# Allegro board PE500_R10_Board_source_file.brd
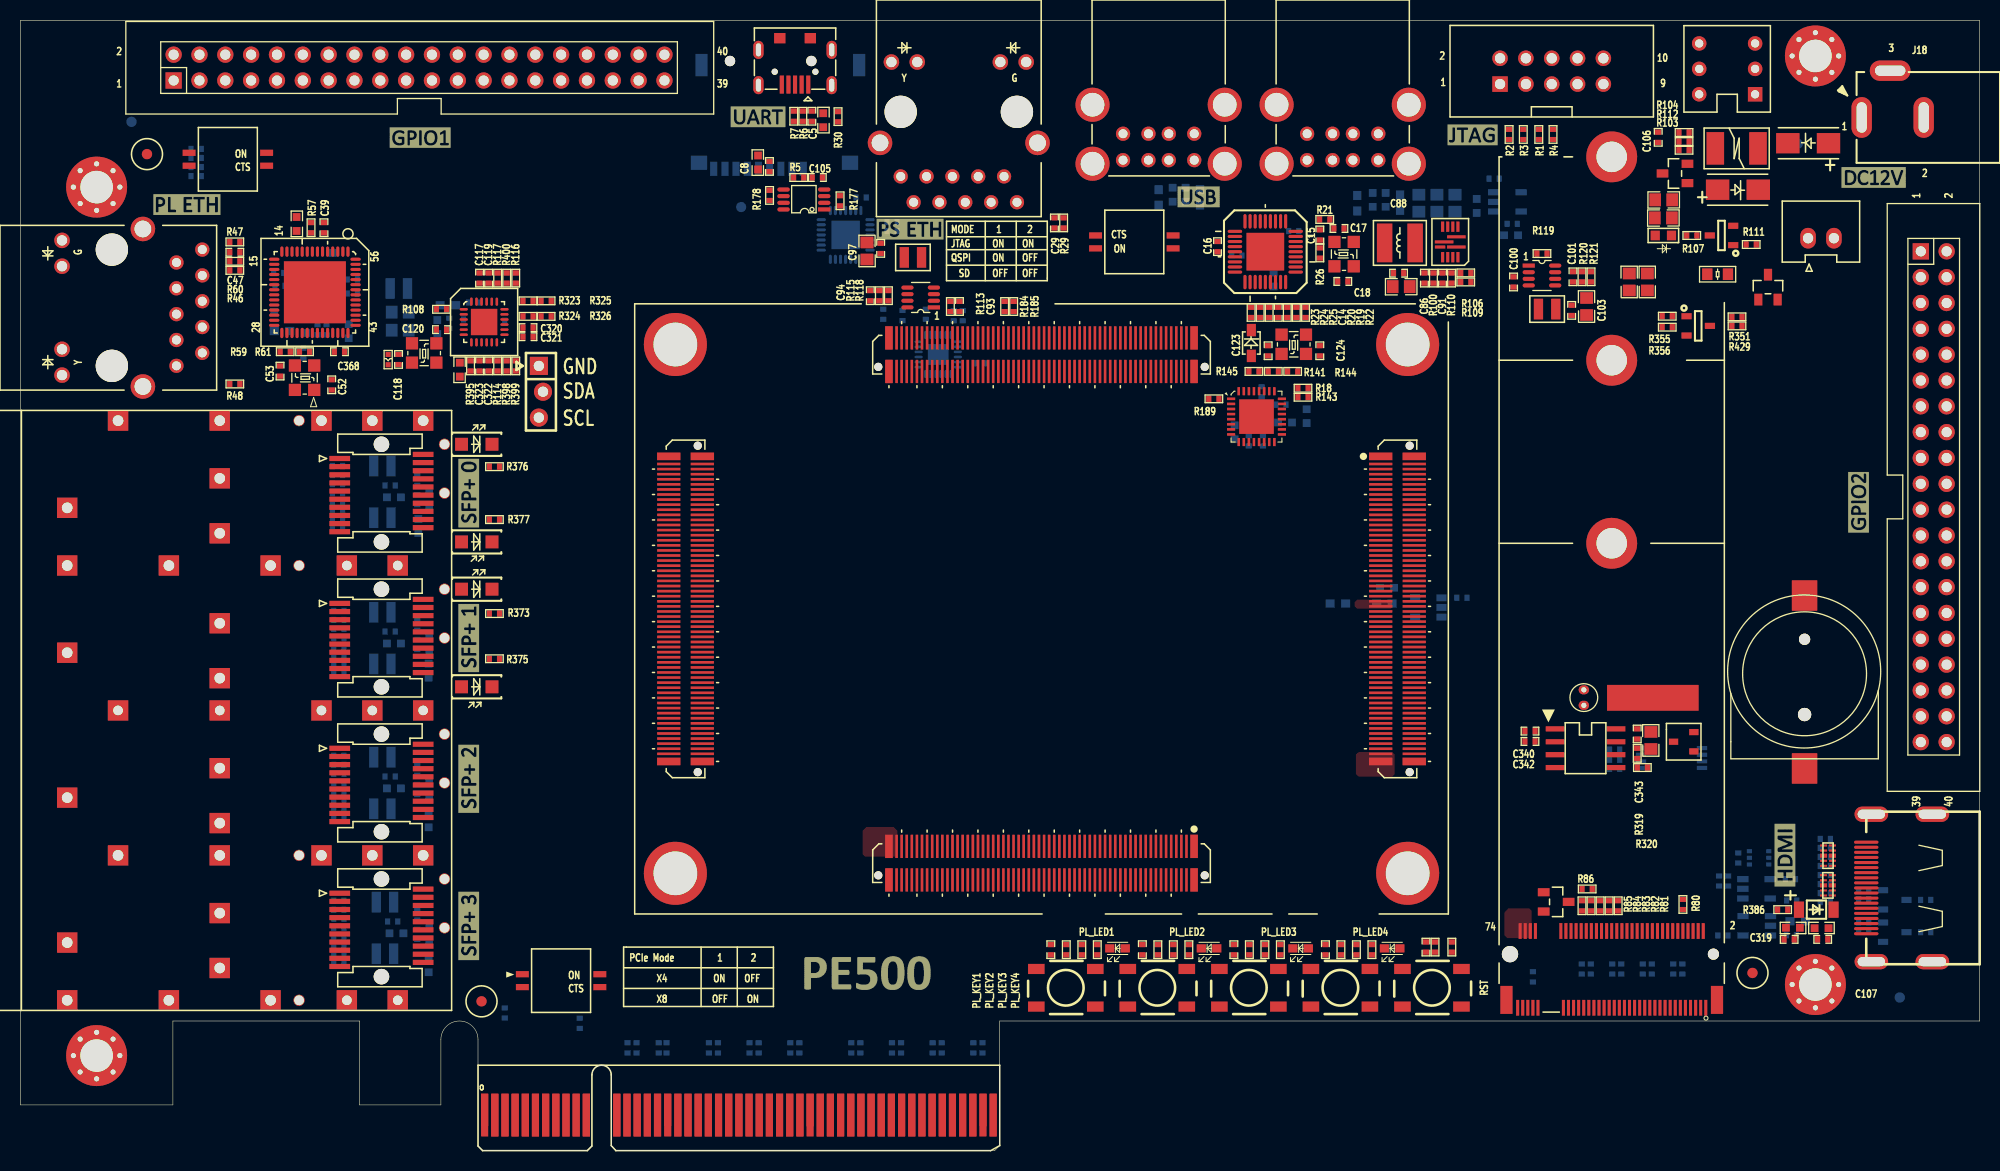
[diagram p0: board, top side]
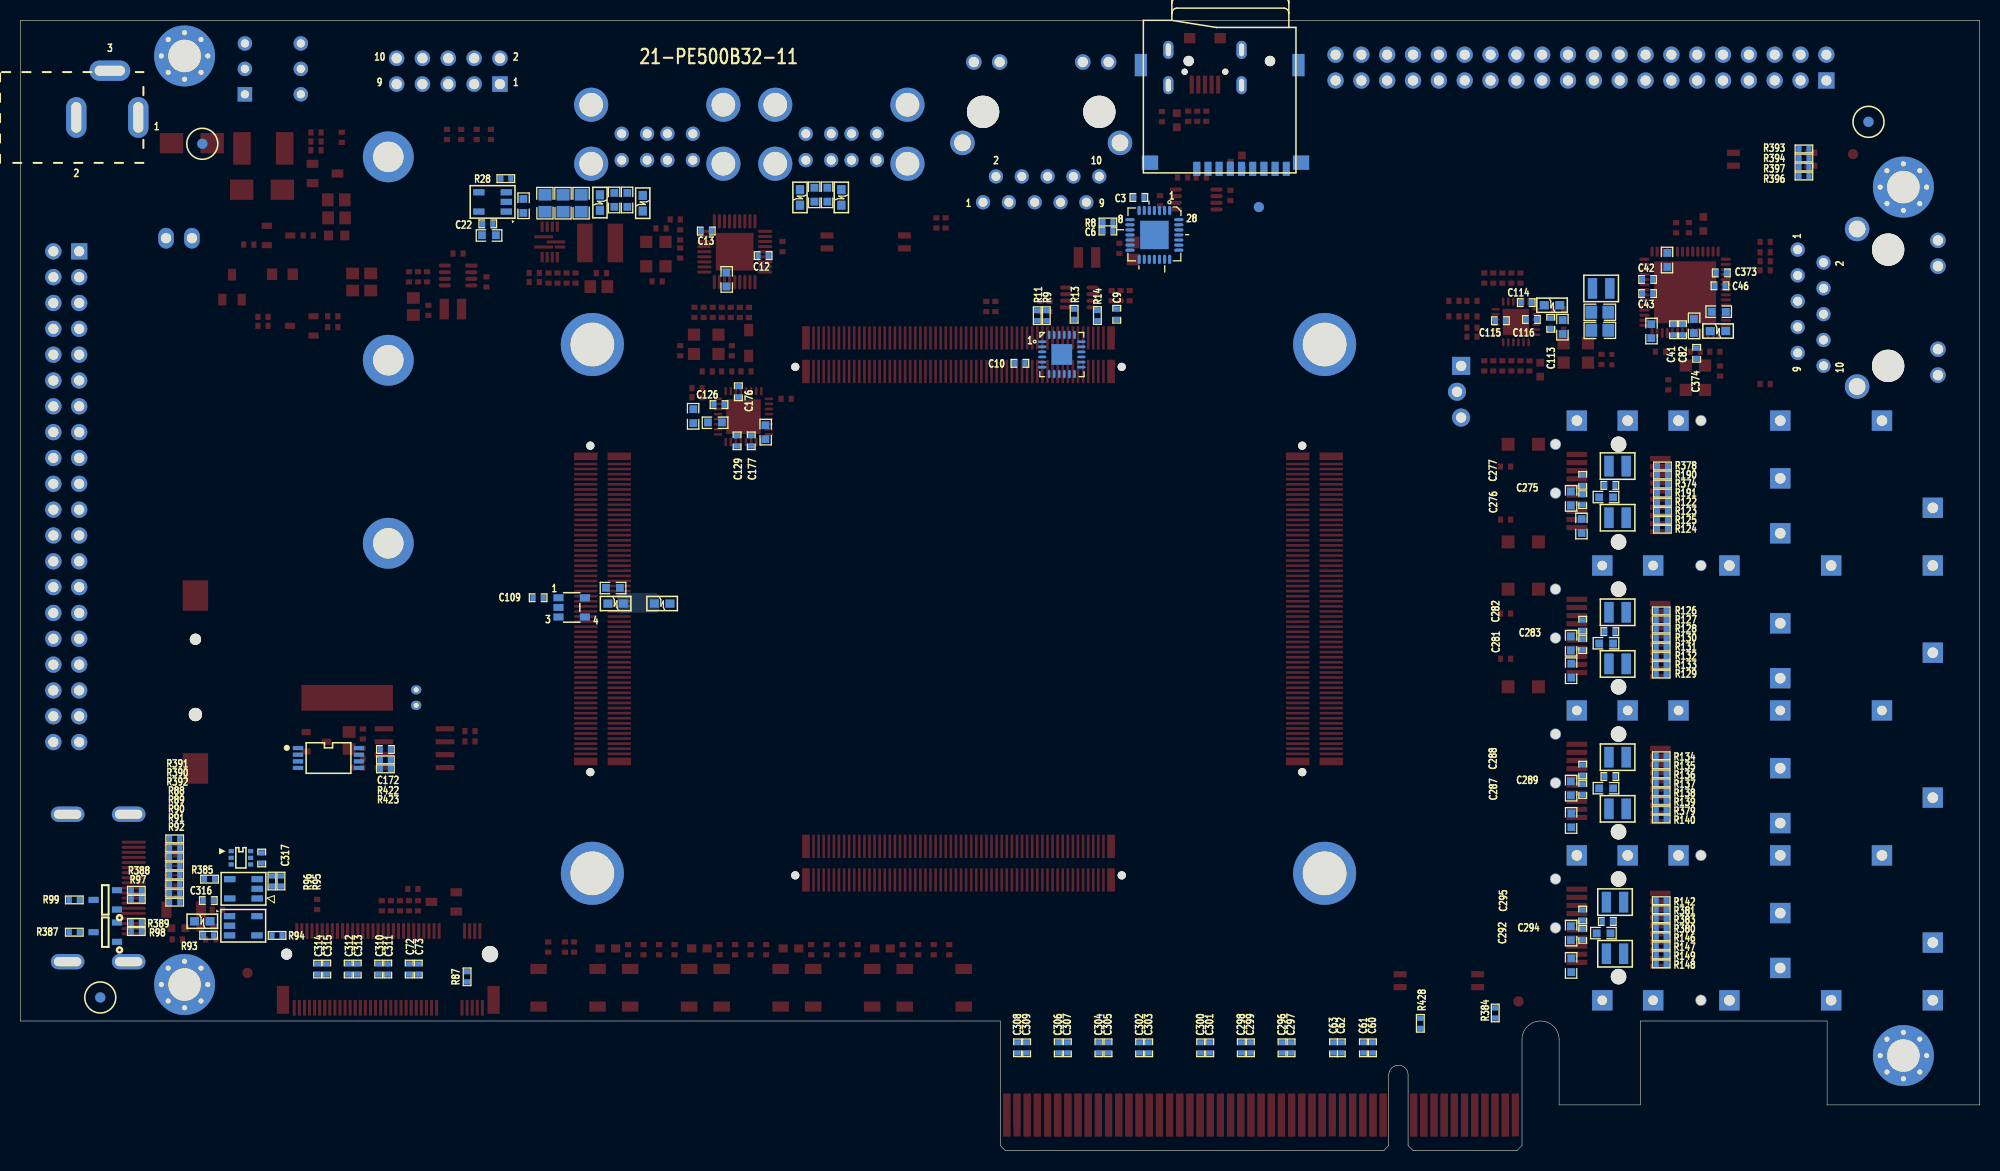
[diagram p1: board, bottom side, seen from below]

Outline 192.65 x 111.15 mm; copper layers: TOP, GND02, VCC03, BOTTOM. Coordinates in mm from the lower left corner of the outline.
Outline path: 0,111.15 192.65,111.15 192.65,12.75 96.3,12.75 96.3,0.51 95.79,0 58.6,0 58.1,0.5 58.1,7.45 arc(57.15,8.4) 56.2,7.45 56.2,0.5 55.7,0 45.5,0 45,0.5 45,10.93 arc(43.18,12.75) 41.35,10.93 41.35,4.5 33.35,4.5 33.35,12.75 15,12.75 15,4.5 0,4.5 0,111.15

## Design rules (mm)
net group B10_L13_MRCC_: nets B10_L13_MRCC_N B10_L13_MRCC_P
net group B12_L1_: nets B12_L1_N B12_L1_P
net group B12_L2_: nets B12_L2_N B12_L2_P
net group B12_L3_: nets B12_L3_N B12_L3_P
net group B12_L4_: nets B12_L4_N B12_L4_P
net group B12_L5_: nets B12_L5_N B12_L5_P
net group B12_L6_: nets B12_L6_N B12_L6_P
net group B12_L7_: nets B12_L7_N B12_L7_P
net group B12_L8_: nets B12_L8_N B12_L8_P
net group B12_L9_: nets B12_L9_N B12_L9_P
net group B12_L10_: nets B12_L10_N B12_L10_P
net group B12_L11_SRCC_: nets B12_L11_SRCC_N B12_L11_SRCC_P
net group B12_L12_MRCC_: nets B12_L12_MRCC_N B12_L12_MRCC_P
net group B12_L13_MRCC_: nets B12_L13_MRCC_N B12_L13_MRCC_P
net group B12_L14_SRCC_: nets B12_L14_SRCC_N B12_L14_SRCC_P
net group B12_L15_: nets B12_L15_N B12_L15_P
net group B12_L16_: nets B12_L16_N B12_L16_P
net group B12_L17_: nets B12_L17_N B12_L17_P
net group B12_L19_: nets B12_L19_N B12_L19_P
net group B12_L20_: nets B12_L20_N B12_L20_P
net group B12_L21_: nets B12_L21_N B12_L21_P
net group B12_L22_: nets B12_L22_N B12_L22_P
net group B12_L23_: nets B12_L23_N B12_L23_P
net group B12_L24_: nets B12_L24_N B12_L24_P
net group B13_L3_: nets B13_L3_N B13_L3_P
net group B13_L7_: nets B13_L7_N B13_L7_P
net group B13_L8_: nets B13_L8_N B13_L8_P
net group B13_L9_: nets B13_L9_N B13_L9_P
net group B13_L24_: nets B13_L24_N B13_L24_P
net group B35_L3_: nets B35_L3_N B35_L3_P
net group B35_L4_: nets B35_L4_N B35_L4_P
net group B35_L5_: nets B35_L5_N B35_L5_P
net group B35_L6_: nets B35_L6_N B35_L6_P
net group B35_L7_: nets B35_L7_N B35_L7_P
net group B35_L10_: nets B35_L10_N B35_L10_P
net group B35_L11_SRCC_: nets B35_L11_SRCC_N B35_L11_SRCC_P
net group B35_L13_MRCC_: nets B35_L13_MRCC_N B35_L13_MRCC_P
net group B35_L15_: nets B35_L15_N B35_L15_P
net group B35_L17_: nets B35_L17_N B35_L17_P
net group B35_L18_: nets B35_L18_N B35_L18_P
net group B35_L19_: nets B35_L19_N B35_L19_P
net group B35_L21_: nets B35_L21_N B35_L21_P
net group B35_L22_: nets B35_L22_N B35_L22_P
net group CLK4: nets N18773510 N18773512
net group DIFFPAIR8: nets N18052822 N18052826
net group DIFFPAIR9: nets USB2UART_DM USB2UART_DP
net group FPGA2SSD_0_N: nets FPGA2SSD_0_N N18228101
net group FPGA2SSD_0_P: nets FPGA2SSD_0_P N18228098
net group FPGA2SSD_1_N: nets FPGA2SSD_1_N N18649568
net group FPGA2SSD_1_P: nets FPGA2SSD_1_P N18649566
net group FPGA2SSD_2_N: nets FPGA2SSD_2_N N18649728
net group FPGA2SSD_2_P: nets FPGA2SSD_2_P N18649726
net group FPGA2SSD_3_N: nets FPGA2SSD_3_N N18649780
net group FPGA2SSD_3_P: nets FPGA2SSD_3_P N18649778
net group MGT109_CLK0_N: nets MGT109_CLK0_N N18833884
net group MGT109_CLK0_P: nets MGT109_CLK0_P N18833882
net group MGT109_CLK1_N: nets MGT109_CLK1_N N18773516
net group MGT109_CLK1_P: nets MGT109_CLK1_P N18773514
net group MGT110_CLK0_: nets MGT110_CLK0_N MGT110_CLK0_P
net group MGT110_CLK1_N: nets MGT110_CLK1_N N18773522
net group MGT110_CLK1_P: nets MGT110_CLK1_P N18773524
net group MGT111_CLK0_: nets MGT111_CLK0_N MGT111_CLK0_P
net group MGT111_CLK1_: nets MGT111_CLK1_N MGT111_CLK1_P
net group MGT112_CLK1_: nets MGT112_CLK1_N MGT112_CLK1_P
net group N18081884: nets N18081884 N18081899
net group PCIE_CLK_N: nets N18229621 PCIE_CLK_N
net group PCIE_CLK_P: nets N18229624 PCIE_CLK_P
net group PCIE_TX0_N: nets N18229523 PCIE_TX0_N
net group PCIE_TX0_P: nets N18229526 PCIE_TX0_P
net group PCIE_TX1_N: nets N18640190 PCIE_TX1_N
net group PCIE_TX1_P: nets N18640192 PCIE_TX1_P
net group PCIE_TX2_N: nets N18640268 PCIE_TX2_N
net group PCIE_TX2_P: nets N18640270 PCIE_TX2_P
net group PCIE_TX3_N: nets N18640348 PCIE_TX3_N
net group PCIE_TX3_P: nets N18640350 PCIE_TX3_P
net group PCIE_TX4_N: nets N18640430 PCIE_TX4_N
net group PCIE_TX4_P: nets N18640432 PCIE_TX4_P
net group PCIE_TX5_N: nets N18640514 PCIE_TX5_N
net group PCIE_TX5_P: nets N18640516 PCIE_TX5_P
net group PCIE_TX6_N: nets N18640702 PCIE_TX6_N
net group PCIE_TX6_P: nets N18640704 PCIE_TX6_P
net group PCIE_TX7_N: nets N18640790 PCIE_TX7_N
net group PCIE_TX7_P: nets N18640792 PCIE_TX7_P
net group USB_OTG_: nets USB_OTG_N USB_OTG_P
net group XADC_V: nets B10_L6_P B10_L15_N
net group DIFF-LOCAL: nets ETH0_MDI0_N ETH0_MDI0_P ETH0_MDI1_N ETH0_MDI1_P ETH0_MDI2_N ETH0_MDI2_P ETH0_MDI3_N ETH0_MDI3_P ETH1_MDI0_N ETH1_MDI0_P ETH1_MDI1_N ETH1_MDI1_P ETH1_MDI2_N ETH1_MDI2_P ETH1_MDI3_N ETH1_MDI3_P GPIO1_0N GPIO1_0P GPIO1_1N GPIO1_1P GPIO1_2N GPIO1_2P GPIO1_3N GPIO1_3P GPIO1_4N GPIO1_4P GPIO1_5N GPIO1_5P GPIO1_6N GPIO1_6P GPIO1_7N GPIO1_7P GPIO1_8N GPIO1_8P GPIO1_9N GPIO1_9P GPIO1_10N GPIO1_10P GPIO1_11N GPIO1_11P GPIO1_12N GPIO1_12P GPIO1_13N GPIO1_13P GPIO1_14N GPIO1_14P GPIO1_15N GPIO1_15P GPIO1_16N GPIO1_16P GPIO1_17N GPIO1_17P GPIO2_0N GPIO2_0P GPIO2_1N GPIO2_1P GPIO2_2N GPIO2_2P GPIO2_3N GPIO2_3P GPIO2_4N GPIO2_4P GPIO2_5N GPIO2_5P GPIO2_6N GPIO2_6P GPIO2_7N GPIO2_7P GPIO2_8N GPIO2_8P GPIO2_9N GPIO2_9P GPIO2_10N GPIO2_10P GPIO2_11N GPIO2_11P GPIO2_12N GPIO2_12P GPIO2_13N GPIO2_13P GPIO2_14N GPIO2_14P GPIO2_15N GPIO2_15P GPIO2_16N GPIO2_16P GPIO2_17N GPIO2_17P M2_REFCLK_N M2_REFCLK_P N18054871 N18054877 N18054879 N18054885 N18054887 N18054897 N18054907 N18054909 PCIE_RX0_N PCIE_RX0_P PCIE_RX1_N PCIE_RX1_P PCIE_RX2_N PCIE_RX2_P PCIE_RX3_N PCIE_RX3_P PCIE_RX4_N PCIE_RX4_P PCIE_RX5_N PCIE_RX5_P PCIE_RX6_N PCIE_RX6_P PCIE_RX7_N PCIE_RX7_P SFP0_RX_N SFP0_RX_P SFP0_TX_N SFP0_TX_P SFP1_RX_N SFP1_RX_P SFP1_TX_N SFP1_TX_P SFP2_RX_N SFP2_RX_P SFP2_TX_N SFP2_TX_P SFP3_RX_N SFP3_RX_P SFP3_TX_N SFP3_TX_P SSD2FPGA_0_N SSD2FPGA_0_P SSD2FPGA_1_N SSD2FPGA_1_P SSD2FPGA_2_N SSD2FPGA_2_P SSD2FPGA_3_N SSD2FPGA_3_P
net group ETH-RX: nets ETH1_RXCK ETH1_RXCTL ETH1_RXD0 ETH1_RXD1 ETH1_RXD2 ETH1_RXD3
net group ETH-TX: nets ETH1_TXCK ETH1_TXCTL ETH1_TXD0 ETH1_TXD1 ETH1_TXD2 ETH1_TXD3
net group HDMI: nets HDMI_CLK_N HDMI_CLK_P HDMI_D0_N HDMI_D0_P HDMI_D1_N HDMI_D1_P HDMI_D2_N HDMI_D2_P
net group OTG: nets OTG_DATA0 OTG_DATA1 OTG_DATA2 OTG_DATA3 OTG_DATA4 OTG_DATA5 OTG_DATA6 OTG_DATA7 OTG_DIR OTG_NXT OTG_STP
net group OTG_CLK: nets N18630211
net group SD: nets SD_CLK SD_CMD SD_DATA0 SD_DATA1 SD_DATA2 SD_DATA3

## Placement (name value [footprint] x y rotation side)
B1  BLM18PG121SN1D  [0603L]  129.55 53.8 0 bottom
B4  BLM18PG121SN1D  [0603L]  131.45 93.17 90 bottom
B5  BLM18PG121SN1D  [0603L]  135.66 93.23 90 bottom
B6  BLM18PG121SN1D  [0603L]  111.93 93.74 90 bottom
B7  BLM18PG121SN1D  [0603L]  115.99 93.74 90 bottom
B9  BLM18PG121SN1D  [0603L]  25.72 80.6 0 bottom
B10  BLM18PG121SN1D  [0603L]  42.04 83.14 0 bottom
B11  BLM15AX601SN1D  [0402L]  36.16 77.79 90 top
B18  BLM18PG121SN1D(NC)  [0603L]  134.12 53.8 180 bottom
BT1  CR1220  [BATSO]  175.43 36.59 270 top
C3  0.1uF  [0402C]  82.67 93.73 0 bottom
C4  10uF/10V  [0603C]  78.94 101.33 90 top
C5  0.1uF  [0402C]  77.82 101.72 90 top
C6  0.1uF  [0402C]  85.72 90.43 0 bottom
C7  10uF/6.3V  [0603C]  72.53 97.17 270 top
C8  0.1uF  [0402C]  73.65 96.78 270 top
C9  0.1uF  [0402C]  84.84 82.25 90 bottom
C10  0.1uF  [0402C]  94.37 77.42 0 bottom
C11  10uF/6.3V  [0603C]  123.22 85.66 90 bottom
C12  0.1uF  [0402C]  119.62 88.02 0 bottom
C13  0.1uF  [0402C]  125.21 90.43 180 bottom
C14  0.1uF  [0402C]  123.68 82.43 270 top
C15  1uF  [0402C]  127.77 90.05 90 top
C16  1uF  [0402C]  117.71 88.9 90 top
C17  12pF  [0402C]  129.65 90.68 0 top
C18  12pF  [0402C]  130.03 85.48 180 top
C19  10uF/10V  [0603C]  132.97 93.5 270 bottom
C20  10uF/10V  [0603C]  146.58 90.02 180 bottom
C21  10uF/10V  [0603C]  134.24 93.5 270 bottom
C22  0.1uF  [0402C]  146.69 91.14 180 bottom
C23  10uF/10V  [0603C]  143.19 92.9 90 bottom
C24  47uF/10V  [0805C]  141.06 93.17 90 bottom
C25  47uF/10V  [0805C]  137.5 93.17 90 bottom
C26  47uF/10V  [0805C]  139.28 93.17 90 bottom
C27  10uF/10V  [0603C]  113.3 94 270 bottom
C28  10uF/10V  [0603C]  114.57 94 270 bottom
C29  0.1uF  [0402C]  101.68 91.23 270 top
C35  0.1uF  [0402C]  138.21 20.02 90 top
C36  0.1uF  [0402C]  110.32 19.76 90 top
C37  0.1uF  [0402C]  119.32 19.76 90 top
C38  10uF/6.3V  [0603C]  32.29 80.58 90 bottom
C39  0.1uF  [0402C]  29.85 90.76 90 top
C40  10uF/6.3V  [0603C]  30.72 87.59 270 bottom
C41  0.1uF  [0402C]  30.11 80.72 90 bottom
C42  0.1uF  [0402C]  32.65 85.68 180 bottom
C43  0.1uF  [0402C]  32.65 84.28 180 bottom
C44  10uF/6.3V  [0603C]  27.16 91.13 90 top
C45  10uF/6.3V  [0603C]  25.65 82.48 0 bottom
C46  0.1uF  [0402C]  25.53 85.04 0 bottom
C47  0.1uF  [0402C]  21.09 88.34 0 top
C52  12pF  [0402C]  30.61 75.31 90 top
C53  12pF  [0402C]  25.53 76.66 270 top
C60  0.1uF  [0402C]  59.71 10.11 270 bottom
C61  0.1uF  [0402C]  60.59 10.11 270 bottom
C62  0.1uF  [0402C]  62.77 10.11 270 bottom
C63  0.1uF  [0402C]  63.53 10.11 270 bottom
C72  0.1uF  [0402C]  154.42 17.86 90 bottom
C73  0.1uF  [0402C]  153.53 17.86 90 bottom
C82  0.1uF  [0402C]  29.22 80.72 90 bottom
C86  0.1uF  [0402C]  138.06 85.8 270 top
C87  47uF/10V  [0805C]  135.77 84.97 180 top
C88  0.1uF  [0402C]  135.52 86.29 180 top
C89  10uF/25V  [0805C]  161.55 91.72 180 top
C90  10uF/25V  [0805C]  161.58 93.5 180 top
C91  0.1uF  [0402C]  139.83 85.8 270 top
C93  0.1uF  [0402C]  92.34 83.01 90 top
C94  15pF  [0402C]  83.57 84.07 270 top
C96  47uF/6.3V  [0805C]  83.24 88.47 270 top
C97  0.1uF  [0402C]  84.59 88.72 270 top
C100  0.1uF  [0402C]  146.82 85.42 90 top
C101  15pF  [0402C]  152.66 85.93 90 top
C102  47uF/6.3V  [0805C]  154.01 83.01 90 top
C103  0.1uF  [0402C]  152.53 82.63 90 top
C104  10uF/6.3V  [0603C]  174.29 21.92 0 top
C105  0.1uF  [0402C]  78.37 95.7 0 top
C106  0.1uF  [0402C]  161.04 99.65 270 top
C107  0.1uF  [0402C]  177.22 20.78 180 top
C108  10uF/6.3V  [0603C]  134.39 55.35 180 bottom
C109  0.1uF  [0402C]  141.74 54.37 0 bottom
C112  10uF/6.3V  [0603C]  41 80.99 270 bottom
C113  0.1uF  [0402C]  42.17 81.36 270 bottom
C114  0.1uF  [0402C]  44.58 83.39 0 bottom
C115  0.1uF  [0402C]  47.12 81.61 180 bottom
C116  0.1uF  [0402C]  44.08 81.74 0 bottom
C117  0.1uF  [0402C]  45.16 85.8 270 top
C118  0.1uF  [0402C]  37.19 77.8 90 top
C119  0.1uF  [0402C]  46.04 85.8 270 top
C120  0.1uF(NC)  [0402C]  41.41 80.74 180 top
C123  12pF  [0402C]  122.69 78.66 90 top
C124  12pF  [0402C]  127.77 78.66 270 top
C125  10uF/6.3V  [0603C]  124.35 71.61 180 bottom
C126  0.1uF  [0402C]  123.96 73.36 180 bottom
C127  0.1uF  [0603C]  119.39 70.65 90 bottom
C128  10uF/6.3V  [0603C]  126.47 72.23 270 bottom
C129  0.1uF  [0402C]  122.18 69.8 90 bottom
C172  0.1uF  [0402C]  156.76 39.45 180 bottom
C176  0.1uF  [0402C]  122.05 74.63 270 bottom
C177  0.1uF  [0402C]  120.78 69.8 90 bottom
C272  10uF/6.3V  [0603C]  40.2 64.13 90 bottom
C273  10uF/6.3V  [0603C]  39.13 61.43 270 bottom
C274  10uF/6.3V  [0603C]  36.73 64.25 0 bottom
C275  0.1uF  [0402C]  36.36 65.42 0 bottom
C276  0.1uF  [0402C]  39.03 64.02 90 bottom
C277  0.1uF  [0402C]  39.03 65.92 270 bottom
C278  10uF/6.3V  [0603C]  36.73 49.87 0 bottom
C279  10uF/6.3V  [0603C]  40.2 49.88 90 bottom
C280  10uF/6.3V  [0603C]  40.15 47.21 270 bottom
C281  0.1uF  [0402C]  39.03 49.77 90 bottom
C282  0.1uF  [0402C]  39.03 51.67 270 bottom
C283  0.1uF  [0402C]  36.36 51.04 0 bottom
C284  10uF/6.3V  [0603C]  40.15 32.48 270 bottom
C285  10uF/6.3V  [0603C]  40.2 35.63 90 bottom
C286  10uF/6.3V  [0603C]  36.73 35.62 0 bottom
C287  0.1uF  [0402C]  39.03 35.52 90 bottom
C288  0.1uF  [0402C]  39.03 37.42 270 bottom
C289  0.1uF  [0402C]  36.36 36.79 0 bottom
C290  10uF/6.3V  [0603C]  40.2 21.38 90 bottom
C291  10uF/6.3V  [0603C]  40.15 18.23 270 bottom
C292  0.1uF  [0402C]  39.03 21.27 90 bottom
C293  10uF/6.3V  [0603C]  36.98 21.37 0 bottom
C294  0.1uF  [0402C]  36.61 22.54 0 bottom
C295  0.1uF  [0402C]  39.03 23.17 270 bottom
C296  0.1uF  [0402C]  68.59 10.11 270 bottom
C297  0.1uF  [0402C]  67.71 10.11 270 bottom
C298  0.1uF  [0402C]  72.59 10.11 270 bottom
C299  0.1uF  [0402C]  71.71 10.11 270 bottom
C300  0.1uF  [0402C]  76.59 10.11 270 bottom
C301  0.1uF  [0402C]  75.71 10.11 270 bottom
C302  0.1uF  [0402C]  82.59 10.11 270 bottom
C303  0.1uF  [0402C]  81.71 10.11 270 bottom
C304  0.1uF  [0402C]  86.59 10.11 270 bottom
C305  0.1uF  [0402C]  85.71 10.11 270 bottom
C306  0.1uF  [0402C]  90.59 10.11 270 bottom
C307  0.1uF  [0402C]  89.71 10.11 270 bottom
C308  0.1uF  [0402C]  94.59 10.11 270 bottom
C309  0.1uF  [0402C]  93.71 10.11 270 bottom
C310  0.1uF  [0402C]  157.42 17.86 90 bottom
C311  0.1uF  [0402C]  156.53 17.86 90 bottom
C312  0.1uF  [0402C]  160.42 17.86 90 bottom
C313  0.1uF  [0402C]  159.53 17.86 90 bottom
C314  0.1uF  [0402C]  163.42 17.86 90 bottom
C315  0.1uF  [0402C]  162.53 17.86 90 bottom
C316  0.1uF  [0402C]  174.17 24.59 180 bottom
C317  0.1uF  [0402C]  168.92 28.78 90 bottom
C318  10uF/6.3V  [0603C]  177.1 21.87 180 top
C319  0.1uF  [0402C]  173.92 20.78 0 top
C320  0.1uF  [0402C]  49.92 80.93 180 top
C321  0.1uF  [0402C]  49.92 80.04 180 top
C322  0.1uF  [0402C]  46.04 77.17 90 top
C323  0.1uF  [0402C]  45.16 77.17 90 top
C340  15pF(NC)  [0402C]  148.44 41.26 180 top
C341  47uF/6.3V  [0805C]  160.32 40.34 90 top
C342  15pF(NC)  [0402C]  148.44 40.24 180 top
C343  0.1uF  [0402C]  158.98 40.97 90 top
C344  0.1uF  [0402C]  128.32 19.76 90 top
C345  0.1uF  [0402C]  101.32 19.76 90 top
C366  10uF/25V  [0805C]  158.2 85.42 90 top
C367  10uF/25V  [0805C]  159.98 85.42 90 top
C368  220nF  [0402C]  31.38 78.56 0 top
C369  10uF/6.3V  [0603C]  28.1 81.09 90 bottom
C370  0.47uF  [0603C]  43.21 76.8 270 top
C371  47uF/6.3V  [0805C]  37.34 80.67 0 bottom
C372  47uF/6.3V  [0805C]  37.34 82.45 0 bottom
C373  0.1uF  [0402C]  25.41 86.31 0 bottom
C374  0.1uF  [0402C]  27.83 78.41 270 bottom
D5  SS54F  [SMA]  175.79 99.07 180 top
D6  RED_LED  [0603LED_AK]  161.55 89.99 180 top
D8  GREEN_LED  [0603LED]  107.88 19.89 180 top
D9  GREEN_LED  [0603LED]  134.88 19.89 180 top
D10  GREEN_LED  [0603LED]  125.88 19.89 180 top
D11  GREEN_LED  [0603LED]  116.88 19.89 180 top
D12  BAT54WS-7-F  [SOD323]  121.04 79.42 90 top
D19  GREEN_LED  [1206LED]  44.88 55.21 0 top
D20  GREEN_LED  [1206LED]  44.88 45.61 0 top
D21  GREEN_LED  [1206LED]  44.88 69.46 0 top
D23  GREEN_LED  [1206LED]  44.88 59.86 0 top
D24  1N5819  [SOD-123]  176.58 23.7 0 top
D25  SS54F  [SMA]  168.88 94.49 0 top
D26  BAT54C/SOT  [SOT23-236AB]  163.55 40.21 90 top
F1  3A  [1812F]  168.76 98.56 180 top
F2  SMD0603-050  [0603F]  174.76 22.56 0 bottom
J2  JTAG  [HDR254F-2X5X850]  150.57 106.15 90 top
J3  CON2  [XH2_1X2_2P54MM]  177.05 89.73 270 top
J4  USB_MicroType  [USBMICRO_H]  76.17 104.83 180 top
J5  MicroSD  [TF-15-15B]  74.73 103.65 0 bottom
J6  DUAL USB  [USB_TPYEA_DUAL]  130.02 98.7 270 top
J7  DUAL USB  [USB_TPYEA_DUAL]  111.92 98.7 270 top
J8  HR911130A  [RJ45_HR911130A]  92.27 102.15 0 top
J9  HR911130A  [RJ45_HR911130A]  9 82.89 90 top
J11  M.2 Key M Socket 2/3  2280  [M2_KEY_M_SOCKET]  156.47 18.12 180 top
J18  DC_JACK  [DC_0050]  187.15 101.6 0 top
J20  SFP_CON_74441-0010  [2X10-SFP]  35.51 50.21 0 top
J21  SFP_CON_74441-0010  [2X10-SFP]  35.51 64.46 0 top
J22  SFP_CON_74441-0010  [2X10-SFP]  35.51 21.71 0 top
J23  SFP_CON_74441-0010  [2X10-SFP]  35.51 35.96 0 top
J24  PCIe x8  [FINGER-PCI-EX8]  70.65 4.2 0 top
J25  CON40A  [IDC40-2_54A]  39.2 106.5 0 top
J26  CON40A  [IDC40-2_54A]  188.13 64.3 270 top
J27  HDMI  [HDMI19S]  181.5 25.83 90 top
J28  CON3(NC)  [SIP3-2P54-0P4H]  50.98 77.17 270 top
JM1  AXK6A2337YG  [CON120-0P5-2X60-M-AXK6A2337]  100.41 78.27 90 top
JM2  AXK6A2337YG  [CON120-0P5-2X60-M-AXK6A2337]  135.41 53.27 180 top
JM3  AXK6A2337YG  [CON120-0P5-2X60-M-AXK6A2337]  100.41 28.27 90 top
JM4  AXK6A2337YG  [CON120-0P5-2X60-M-AXK6A2337]  65.41 53.27 180 top
K1  SW_4P  [KEY4X4-1P5H]  138.79 16.02 180 top
K2  SW_4P  [KEY4X4-1P5H]  129.79 16.02 180 top
K3  SW_4P  [KEY4X4-1P5H]  120.79 16.02 180 top
K4  SW_4P  [KEY4X4-1P5H]  111.79 16.02 180 top
K5  SW_4P  [KEY4X4-1P5H]  102.79 16.02 180 top
L1  1.5uH  [L4020]  135.64 89.26 180 top
L3  1uH  [L2520]  87.76 87.84 180 top
L4  1uH  [L2520]  150.12 82.76 0 top
L5  4.7uH  [L2520]  35.6 62.24 0 bottom
L6  4.7uH  [L2520]  35.6 67.32 0 bottom
L7  4.7uH  [L2520]  35.6 47.86 0 bottom
L8  4.7uH  [L2520]  35.6 52.94 0 bottom
L12  4.7uH  [L2520]  35.6 33.61 0 bottom
L13  4.7uH  [L2520]  35.6 38.69 0 bottom
L14  4.7uH  [L2520]  35.85 19.36 0 bottom
L15  4.7uH  [L2520]  35.85 24.44 0 bottom
L16  1.5uH  [L2520]  37.22 84.79 0 bottom
M1  SMTSO  [HOLE170_244T]  64.41 27.27 0 top
M2  SMTSO  [HOLE170_244T]  136.41 79.27 0 top
M3  SMTSO  [HOLE170_244T]  136.41 27.27 0 top
M4  SMTSO  [HOLE170_244T]  64.41 79.27 0 top
M5  Hole  [HOLE32CIR60]  7.5 94.75 0 top
M6  Hole  [HOLE32CIR60]  7.5 9.35 0 top
M7  Hole  [HOLE32CIR60]  176.5 107.65 0 top
M8  Hole  [HOLE32CIR60]  176.5 16.33 0 top
NOREF  -  []  45.5 0 90 top
NOREF#2  -  []  150.9 37.67 0 top
NOREF#3  -  []  170.01 28.15 90 top
NOREF#4  -  []  166.66 98.56 0 top
NOREF#5  -  []  83.54 88.55 90 top
NOREF#6  -  []  75.04 94.52 0 top
NOREF#7  -  []  170.57 103.88 90 top
NOREF#8  -  []  170.57 103.88 90 top
NOREF#9  -  [unnamed#2]  45.35 14.68 0 top
NOREF#10  -  []  170.01 28.8 90 top
NOREF#11  -  []  164.55 39.26 90 top
NOREF#12  -  [unnamed#2]  170.31 17.48 0 top
NOREF#13  -  []  0 111.15 0 top
NOREF#14  -  []  172.07 102.13 90 top
NOREF#15  -  []  43.38 45.61 0 top
NOREF#16  -  []  79.04 93.87 90 top
NOREF#17  -  []  82.64 87.65 90 top
NOREF#18  -  []  150.9 37.67 90 top
NOREF#19  -  []  150.9 37.67 90 top
NOREF#20  -  []  43.38 55.21 0 top
NOREF#21  -  []  170.01 28.15 0 top
NOREF#22  -  []  43.38 59.86 0 top
NOREF#23  -  [unnamed#2]  12.45 97.99 0 top
NOREF#24  -  []  43.38 69.46 0 top
NOREF#25  -  []  162.55 40.21 90 top
NOREF#26  -  []  79.04 92.56 90 top
NOREF#27  -  []  165.07 108.88 0 top
NOREF#28  -  []  78.74 88.55 90 top
NOREF#29  -  []  -6.99 13.79 0 top
NOREF#30  -  []  83.54 88.55 90 top
NOREF#31  -  []  163.57 110.63 0 top
NOREF#32  -  [unnamed#2]  174.76 99.01 180 bottom
NOREF#33  -  [unnamed#2]  10.93 101.17 180 bottom
NOREF#34  -  [unnamed#2]  184.79 15.06 180 bottom
Q1  WNM2021-3TR  [AO3415]  151.01 24.46 270 top
Q3  -  [AO3415]  162.69 96.09 90 top
Q5  MMBT5551  [SOT23]  167.27 89.99 180 top
Q6  2N7002  [SOT23]  184.3 21.48 0 bottom
Q7  2N7002  [SOT23]  184.3 24.66 0 bottom
Q8  MMBT5551  [SOT23]  164.98 81.1 0 top
Q10  -  [AO3415]  171.84 84.91 0 top
R1  0R  [0402R]  149.3 99.93 90 top
R2  0R  [0402R]  146.38 99.93 90 top
R3  0R  [0402R]  147.78 99.93 90 top
R4  0R  [0402R]  150.7 99.93 90 top
R5  4.7K  [0402R]  76.53 95.7 0 top
R6  33R  [0402R]  76.94 101.72 270 top
R7  33R  [0402R]  76.05 101.72 270 top
R8  4.7K  [0402R]  85.72 91.32 180 bottom
R9  4.7k(NC)  [0402R]  91.77 82.11 90 bottom
R11  4.7K  [0402R]  92.66 82.11 270 bottom
R13  4.7K  [0402R]  89.03 82.25 90 bottom
R14  4.7K(NC)  [0402R]  86.75 82.12 90 bottom
R18  10K  [0402R]  126.12 74.98 180 top
R19  10K  [0402R]  125.46 82.43 270 top
R20  10K  [0402R]  124.57 82.43 270 top
R21  12K 1%  [0402R]  128.25 91.57 0 top
R22  10K  [0402R]  126.37 82.43 270 top
R23  10K  [0402R]  121.02 82.43 270 top
R24  10K  [0402R]  121.9 82.43 270 top
R25  10K  [0402R]  122.79 82.43 270 top
R26  10M(NC)  [0402R]  127.77 88.27 270 top
R28  100K  [0402R]  144.91 95.58 180 bottom
R29  330R  [0402R]  102.58 91.23 270 top
R30  330R  [0402R]  80.4 101.68 270 top
R40  10K  [0402R]  111.84 19.76 270 top
R41  10K  [0402R]  139.1 20.02 270 top
R42  10K  [0402R]  120.84 19.76 270 top
R43  330R  [0402R]  140.75 20.02 270 top
R44  330R  [0402R]  113.37 19.76 270 top
R45  330R  [0402R]  122.37 19.76 270 top
R46  4.7K  [0402R]  21.09 86.57 0 top
R47  330R  [0402R]  21.09 89.36 0 top
R48  330R  [0402R]  21.09 75.39 0 top
R57  4.7K  [0402R]  28.58 90.76 270 top
R59  4.99K 1%  [0402R]  26.04 78.56 0 top
R60  0R  [0402R]  21.09 87.45 0 top
R61  10M(NC)  [0402R]  27.95 78.56 180 top
R80  10K  [0402R]  163.47 24.21 90 top
R81  10K  [0402R]  157.11 24.08 90 top
R82  10K  [0402R]  156.22 24.08 90 top
R83  10K  [0402R]  155.33 24.08 90 top
R84  10K  [0402R]  154.44 24.08 90 top
R85  10K  [0402R]  153.55 24.08 90 top
R86  10K  [0402R]  154.06 25.73 180 top
R87  10K  [0402R]  148.72 17.1 90 bottom
R88  49.9R  [0402R]  177.47 27.99 180 bottom
R89  49.9R  [0402R]  177.47 27.1 180 bottom
R90  49.9R  [0402R]  177.47 26.22 180 bottom
R91  49.9R  [0402R]  177.47 25.33 180 bottom
R92  49.9R  [0402R]  177.47 24.44 180 bottom
R93  4.7K  [0402R]  174.14 21.18 180 bottom
R94  4.7K  [0402R]  167.41 21.17 0 bottom
R95  1K  [0402R]  167.03 26.51 90 bottom
R96  100K  [0402R]  167.91 26.51 90 bottom
R97  4.7K  [0402R]  181.25 24.72 180 bottom
R98  4.7K  [0402R]  181.25 21.54 180 bottom
R99  4.7K  [0402R]  187.35 24.66 0 bottom
R100  3R3  [0402R]  138.94 85.8 270 top
R103  4.7K  [0402R]  163.58 98.38 180 top
R104  0R(NC)  [0402R]  163.58 100.12 180 top
R106  100K  [0402R]  142.12 86.31 180 top
R107  10K  [0402R]  164.34 89.99 0 top
R108  33R  [0402R]  41.41 82.74 0 top
R109  33K  [0402R]  142.12 85.42 0 top
R110  4.7K  [0402R]  140.72 85.8 270 top
R111  10K  [0402R]  170.19 89.11 180 top
R112  10K  [0402R]  163.58 99.23 180 top
R113  4.7K  [0402R]  91.45 83.01 90 top
R114  4.7K  [0402R]  46.93 77.17 90 top
R115  20K 1%  [0402R]  84.46 84.07 90 top
R116  4.7K  [0402R]  48.71 85.8 270 top
R117  4.7K  [0402R]  46.93 85.8 270 top
R118  10K 1%  [0402R]  85.35 84.07 270 top
R119  4.7K  [0402R]  149.61 88.22 0 top
R120  45.3K 1%  [0402R]  153.55 85.93 270 top
R121  10K 1%  [0402R]  154.44 85.93 90 top
R122  10K  [0402R]  31.19 63.77 0 bottom
R123  10K  [0402R]  31.19 62.88 0 bottom
R124  10K  [0402R]  31.19 61.12 0 bottom
R125  10K  [0402R]  31.19 62 0 bottom
R126  10K  [0402R]  31.32 53.08 0 bottom
R127  10K  [0402R]  31.32 52.19 0 bottom
R128  10K  [0402R]  31.32 51.3 0 bottom
R129  10K  [0402R]  31.32 46.87 0 bottom
R130  10K  [0402R]  31.32 50.41 0 bottom
R131  10K  [0402R]  31.32 49.52 0 bottom
R132  10K  [0402R]  31.32 48.63 0 bottom
R133  10K  [0402R]  31.32 47.75 0 bottom
R134  10K  [0402R]  31.32 38.83 0 bottom
R135  10K  [0402R]  31.32 37.94 0 bottom
R136  10K  [0402R]  31.32 37.05 0 bottom
R137  10K  [0402R]  31.32 36.16 0 bottom
R138  10K  [0402R]  31.32 35.27 0 bottom
R139  10K  [0402R]  31.32 34.38 0 bottom
R140  10K  [0402R]  31.32 32.62 0 bottom
R141  10M  [0402R]  123.2 76.63 0 top
R142  10K  [0402R]  31.32 24.58 0 bottom
R143  1K  [0402R]  126.12 74.09 0 top
R144  8.06K 1%  [0402R]  125.1 76.63 0 top
R145  4.7K  [0402R]  121.29 76.63 0 top
R146  10K  [0402R]  31.32 21.02 0 bottom
R147  10K  [0402R]  31.32 20.13 0 bottom
R148  10K  [0402R]  31.32 18.37 0 bottom
R149  10K  [0402R]  31.32 19.25 0 bottom
R177  100R  [0402R]  80.6 93.41 90 top
R178  100R  [0402R]  73.67 93.93 90 top
R180  330R  [0402R]  105.89 19.76 270 top
R181  330R  [0402R]  132.89 19.76 270 top
R182  330R  [0402R]  123.89 19.76 270 top
R183  330R  [0402R]  114.89 19.76 270 top
R184  0R  [0402R]  96.78 83.01 270 top
R185  0R(NC)  [0402R]  97.67 83.01 270 top
R189  33R  [0402R]  117.35 73.93 180 top
R190  10K  [0402R]  31.19 66.44 0 bottom
R191  10K  [0402R]  31.19 64.66 0 bottom
R319  4.7K  [0402R]  158.98 39.07 90 top
R320  4.7K  [0402R]  159.49 37.67 0 top
R323  33R  [0402R]  49.92 83.57 0 top
R324  33R  [0402R]  49.92 82.04 0 top
R325  49R9  [0402R]  51.7 83.57 180 top
R326  49R9  [0402R]  51.7 82.04 180 top
R351  10K  [0402R]  168.79 81.99 0 top
R352  0R  [0805R]  166.88 86.18 0 top
R355  10K  [0402R]  161.93 82.06 180 top
R356  10K  [0402R]  161.93 80.98 0 top
R373  270R  [0402R]  46.62 52.82 0 top
R374  10K  [0402R]  31.19 65.55 0 bottom
R375  270R  [0402R]  46.62 48.37 0 top
R376  270R  [0402R]  46.62 67.26 0 top
R377  270R  [0402R]  46.62 62.05 0 top
R378  10K  [0402R]  31.19 67.33 0 bottom
R379  10K  [0402R]  31.32 33.5 0 bottom
R380  10K  [0402R]  31.32 21.91 0 bottom
R381  10K  [0402R]  31.32 23.69 0 bottom
R383  10K  [0402R]  31.32 22.8 0 bottom
R384  0R(NC)  [0402R]  47.63 13.54 90 bottom
R385  1K  [0402R]  174.04 26.7 180 bottom
R386  27K  [0402R]  173.28 23.7 0 top
R387  4.7K  [0402R]  187.35 21.48 0 bottom
R388  0R  [0402R]  181.25 25.61 0 bottom
R389  0R  [0402R]  181.25 22.43 0 bottom
R390  49.9R  [0402R]  177.47 29.77 180 bottom
R391  49.9R  [0402R]  177.47 30.66 180 bottom
R392  49.9R  [0402R]  177.47 28.88 180 bottom
R393  4.7K  [0402R]  17.28 98.5 180 bottom
R394  4.7k(NC)  [0402R]  17.28 97.61 0 bottom
R395  4.7K  [0402R]  44.27 77.17 90 top
R396  4.7K  [0402R]  17.28 95.84 180 bottom
R397  4.7k(NC)  [0402R]  17.28 96.73 0 bottom
R398  4.7K  [0402R]  47.82 77.17 90 top
R399  0R  [0402R]  48.71 77.17 90 top
R400  0R  [0402R]  47.82 85.8 270 top
R422  0R  [0402R]  156.76 38.43 180 bottom
R423  0R  [0402R]  156.76 37.54 180 bottom
R424  10K  [0402R]  129.84 19.76 270 top
R425  330R  [0402R]  131.37 19.76 270 top
R426  10K  [0402R]  102.84 19.76 270 top
R427  330R  [0402R]  104.37 19.76 270 top
R428  4.7K  [0402R]  55 12.52 90 bottom
R429  10K  [0402R]  168.79 81.1 180 top
SW1  SW DIP-2  [218-2LPSTR]  109.53 89.36 90 top
SW2  SW  [SW6-2P5-5P5]  167.82 106.38 90 top
SW3  SW DIP-2  [218-2LPSTR]  53.17 16.72 270 top
SW4  SW DIP-2  [218-2LPSTR]  20.4 97.49 270 top
TP1  TP_R  [TP4]  70.87 92.79 90 bottom
U1  CP2102  [QFN28-0P5-5X5]  81.14 90.05 270 bottom
U2  TXS0102DCTR(NC)  [SOP8-0P65-2X4]  77.04 93.54 90 top
U3  TXS02612RTWR  [QFN24-0P5-4X4]  90.25 78.3 180 bottom
U4  USB2514  [QFN36-0P5-6X6]  122.41 88.4 270 top
U6  88E1512  [QFN56-0P5-8X8TS]  28.96 84.41 270 top
U15  -  [NB679]  140.6 89.36 270 top
U17  MP2143DJ  [SOT23-8]  88.53 83.9 90 top
U18  MP2143DJ  [SOT23-8]  149.61 86.06 270 top
U19  USB3320C-EZK  [QFN32-0P5-5X5T]  121.55 72.18 0 top
U22  TPD4E05U06  [ESD_0524P]  177.74 29.01 270 top
U23  SPX3819M5-X-X(NC)  [SOT-23]  138.44 53.42 270 bottom
U24  TPS2051BDBV  [SOT23-5]  170.73 22.12 180 bottom
U25  NC7WZ07P6X  [SC70-0P65-2X1P25]  170.96 28.8 270 bottom
U26  NC7SZ125M5X  [SOT23-5]  170.71 25.75 0 bottom
U27  CDCI6214RGER  [QFN24-0P5-4X4-T]  45.6 81.49 0 top
U31  SFP+1X4_CAGE  [SFP-1X4-CAGE-U-MAX]  9.61 71.79 270 top
U32  TPD4E05U06  [ESD_0524P]  177.73 26.09 270 top
U33  TPS2051BDBV  [SOT23-5]  146.22 93.3 0 bottom
U44  RX8010SJ  [SOIC8-1P27-5X4]  153.9 39.58 270 top
U45  24C32  [SOP8-0P65-3X4P4]  162.35 38.61 180 bottom
X1  25M_OSC  [XTAL3225M]  39.71 78.44 0 top
Y1  24M  [XTAL3225M]  130.16 88.16 270 top
Y2  25M  [XTAL3225M]  27.95 76.01 90 top
Y4  24M  [XTAL3225M]  125.21 79.29 0 top
Y5  32.768K(NC)  [CY_SMALL]  153.73 43.79 90 top

## Library data of the parts
B1 B4-B7 B9-B11 B18 = BEAD
BT1 = BATTERY_0
C3-C8 C29 C47 C89 C90 C172 = C
C9 C10 C12-C14 C22 C35-C37 C39 C41-C43 C46 C60-C63 C72 C73 C82 C86 C88 C91 C93 C97 C100 C103 C105-C107 C109 C113-C119 C126 C129 C176 C177 C275-C277 C281-C283 C287-C289 C292 C294-C317 C319-C323 C343-C345 = CAP: signal model: CAP_0402C_0.1UF_0.1uF
C11 C15-C21 C23-C28 C38 C40 C44 C45 C52 C53 C87 C94 C96 C101 C102 C104 C108 C112 C120 C123-C125 C127 C128 C272-C274 C278-C280 C284-C286 C290 C291 C293 C318 C340-C342 C366-C374 = CAP
D5 D12 D25 = DIODE
D6 D8-D11 D19-D21 D23 = LED
D24 = DIODE_Z
D26 = BAT54C/SOT
F1 F2 = FUSE
J2 = CON10A: Tolerance: *; User Part Number: *
J3 = CON2: User Part Number: *; Tolerance: *
J4 = USB_MicroType
J5 = MicroSD_1
J6 J7 = DUAL USB: Tolerance: *; User Part Number: *
J8 J9 = RJ45_HR911130A: Tolerance: *; User Part Number: *
J11 = M2_NGFF_Rec
J18 = POWER_DC-JACK: Tolerance: ?; User Part Number: *********
J20-J23 = SFP_CON_74441-0010: User Part Number: *; Tolerance: *
J24 = PCIE_Bracket_X8
J25 J26 = CON40A
J27 = HDMI
J28 = CON3
JM1-JM4 = CONN SOCKET 60x2: User Part Number: *; Tolerance: *
K1-K5 = SW_4P
L1 L3-L8 L12-L16 = L: User Part Number: *; Tolerance: *
M1-M8 TP1 = TP_R
Q1 = WNM2021-3TR
Q3 Q10 = AO3415
Q5 = NPN2
Q6 Q7 = N_2N7002
Q8 = MMBT5551
R1-R4 R9 R11 R18-R25 R28 R46 R57 R59 R60 R80-R87 R108 R114 R116 R117 R122-R140 R142 R146-R149 R180-R183 R190 R191 R323-R326 R351 R352 R355 R356 R373-R381 R383 R384 R393-R400 R428 R429 = RESISTOR
R5-R8 R13 R14 R26 R29 R30 R40-R45 R47 R48 R61 R93-R99 R103 R104 R107 R109 R111 R112 R141 R177 R178 R319 R320 R385-R389 R422-R427 = R
R88-R92 R100 R106 R110 R113 R115 R118-R121 R143-R145 R184 R185 R390-R392 = RES
R189 = RES: signal model: RES_0402R_33R_33R
SW1 SW4 = SW DIP-2_0
SW2 = SW5
SW3 = SW DIP-2
U1 = USB2UART_CP2102
U2 = LevelShift_TXS0102
U3 = LevelShift_TXS02612_SDIO
U4 = USB2514
U6 = 88E1512
U15 = NB679: User Part Number: *; Tolerance: *
U17 U18 = MP2143
U19 = USB3320C-EZK: Tolerance: RichardLC; User Part Number: pn
U22 U32 = RCLAMP0564P
U23 = SPX3819M5-2-5
U24 = TPS2051BDBV
U25 = NC7WZ07P6X
U26 = NC7SZ125M5X
U27 = CDCI6214RGER: User Part Number: *; Tolerance: *
U31 = SFP+1X4_CASE_U: User Part Number: *; Tolerance: *
U33 = Switch_TPS2051BDBV
U44 = PCF8563
U45 = E2PROM-AT24CM01-1Mb: User Part Number: *; Tolerance: *
X1 = OSC
Y1 Y2 Y4 = CRYSTAL_4pin
Y5 = CRYSTAL

## Footprints (pads in the part's own frame, mm; a bottom-side part is the same pattern mirrored in y, then rotated)
2X10-SFP
  round 1.524 hole 1.524 unplated: (0,5) (0,-4.6)
  rect 2.032x0.508 smd: 1(-4.1,3.6) 2(-4.1,2.8) 3(-4.1,2) 4(-4.1,1.2) 5(-4.1,0.4) 6(-4.1,-0.4) 7(-4.1,-1.2) 8(-4.1,-2) 9(-4.1,-2.8) 10(-4.1,-3.6) 11(4.1,-3.2) 12(4.1,-2.4) 13(4.1,-1.6) 14(4.1,-0.8) 15(4.1,0) 16(4.1,0.8) 17(4.1,1.6) 18(4.1,2.4) 19(4.1,3.2) 20(4.1,4)
218-2LPSTR
  rect 0.61x1.27 smd: 1(-0.635,-3.81) 2(0.635,-3.81) 3(0.635,3.81) 4(-0.635,3.81)
0402C
  rect 0.508x0.61 smd: 1(-0.5,0) 2(0.5,0)
0402L
  rect 0.5x0.5 smd: 1(-0.508,0) 2(0.508,0)
0402R
  rect 0.508x0.61 smd: 1(-0.5,0) 2(0.5,0)
0603C
  rect 0.762x0.762 smd: 1(-0.686,0) 2(0.686,0)
0603F
  rect 0.889x0.813 smd: 1(-0.762,0) 2(0.762,0)
0603L
  rect 0.889x0.813 smd: 1(-0.762,0) 2(0.762,0)
0603LED
  rect 0.9x0.8 smd: A(-0.762,0) K(0.762,0)
0603LED_AK
  rect 0.9x0.95 smd: A(0.8,0) K(-0.8,0)
0805C
  rect 1.143x1.27 smd: 1(-0.838,0) 2(0.838,0)
0805R
  rect 1.016x1.143 smd: 1(-1.016,0) 2(1.016,0)
1206LED
  rect 1.27x1.27 smd: A(-1.496,0) K(1.496,0)
1812F
  rect 1.727x3.2 smd: 1(-2.1,0) 2(2.1,0)
AO3415
  rect 0.8x1.15 smd: D(0,1.225) G(-0.95,-1.225) S(0.95,-1.225)
BATSO
  rect 3x2.5 smd: 1(-1,0) 2(-18,0)
  round 1.3 hole 1.3: 3(-6.3,0)
  round 1.1 hole 1.1: 4(-13.7,0)
CON120-0P5-2X60-M-AXK6A2337
  round 0.8 hole 0.8 unplated: (-1.2,16.05) (-1.2,-16.05)
  rect 2.3x0.75 smd: 1(1.65,-15) 2(-1.65,-15) 119(1.65,15) 120(-1.65,15)
  rect 2.286x0.254 smd: 3(1.65,-14.25) 4(-1.65,-14.25) 5(1.65,-13.75) 6(-1.65,-13.75) 7(1.65,-13.25) 8(-1.65,-13.25) 9(1.65,-12.75) 10(-1.65,-12.75) 11(1.65,-12.25) 12(-1.65,-12.25) 13(1.65,-11.75) 14(-1.65,-11.75) 15(1.65,-11.25) 16(-1.65,-11.25) 17(1.65,-10.75) 18(-1.65,-10.75) 19(1.65,-10.25) 20(-1.65,-10.25) 21(1.65,-9.75) 22(-1.65,-9.75) 23(1.65,-9.25) 24(-1.65,-9.25) 25(1.65,-8.75) 26(-1.65,-8.75) 27(1.65,-8.25) 28(-1.65,-8.25) 29(1.65,-7.75) 30(-1.65,-7.75) 31(1.65,-7.25) 32(-1.65,-7.25) 33(1.65,-6.75) 34(-1.65,-6.75) 35(1.65,-6.25) 36(-1.65,-6.25) 37(1.65,-5.75) 38(-1.65,-5.75) 39(1.65,-5.25) 40(-1.65,-5.25) 41(1.65,-4.75) 42(-1.65,-4.75) 43(1.65,-4.25) 44(-1.65,-4.25) 45(1.65,-3.75) 46(-1.65,-3.75) 47(1.65,-3.25) 48(-1.65,-3.25) 49(1.65,-2.75) 50(-1.65,-2.75) 51(1.65,-2.25) 52(-1.65,-2.25) 53(1.65,-1.75) 54(-1.65,-1.75) 55(1.65,-1.25) 56(-1.65,-1.25) 57(1.65,-0.75) 58(-1.65,-0.75) 59(1.65,-0.25) 60(-1.65,-0.25) 61(1.65,0.25) 62(-1.65,0.25) 63(1.65,0.75) 64(-1.65,0.75) 65(1.65,1.25) 66(-1.65,1.25) 67(1.65,1.75) 68(-1.65,1.75) 69(1.65,2.25) 70(-1.65,2.25) 71(1.65,2.75) 72(-1.65,2.75) 73(1.65,3.25) 74(-1.65,3.25) 75(1.65,3.75) 76(-1.65,3.75) 77(1.65,4.25) 78(-1.65,4.25) 79(1.65,4.75) 80(-1.65,4.75) 81(1.65,5.25) 82(-1.65,5.25) 83(1.65,5.75) 84(-1.65,5.75) 85(1.65,6.25) 86(-1.65,6.25) 87(1.65,6.75) 88(-1.65,6.75) 89(1.65,7.25) 90(-1.65,7.25) 91(1.65,7.75) 92(-1.65,7.75) 93(1.65,8.25) 94(-1.65,8.25) 95(1.65,8.75) 96(-1.65,8.75) 97(1.65,9.25) 98(-1.65,9.25) 99(1.65,9.75) 100(-1.65,9.75) 101(1.65,10.25) 102(-1.65,10.25) 103(1.65,10.75) 104(-1.65,10.75) 105(1.65,11.25) 106(-1.65,11.25) 107(1.65,11.75) 108(-1.65,11.75) 109(1.65,12.25) 110(-1.65,12.25) 111(1.65,12.75) 112(-1.65,12.75) 113(1.65,13.25) 114(-1.65,13.25) 115(1.65,13.75) 116(-1.65,13.75) 117(1.65,14.25) 118(-1.65,14.25)
CY_SMALL
  oval 0.889x1.016 hole 0.508: 1(0,0) 2(1.524,0)
  rect 2.54x9 smd: 3(0.737,-6.782)
DC_0050
  oval 2x4 hole 1x3: 1(-6.1,0) 2(0,0)
  oval 4x2 hole 3x1: 3(-3.3,4.6)
ESD_0524P
  rect 0.2x0.68 smd: 1(-1,-0.44) 2(-0.5,-0.44) 4(0.5,-0.44) 5(1,-0.44) 6(1,0.44) 7(0.5,0.44) 9(-0.5,0.44) 10(-1,0.44)
  rect 0.4x0.68 smd: 3(0,-0.44) 8(0,0.44)
FINGER-PCI-EX8
  rect 0.7x3.2 smd: A1(-25,-0.2) B17(-7,-0.2) B31(7,-0.2) B48(24,-0.2)
  rect 0.7x4.2 smd: A2(-24,-0.7) A3(-23,-0.7) A4(-22,-0.7) A5(-21,-0.7) A6(-20,-0.7) A7(-19,-0.7) A8(-18,-0.7) A9(-17,-0.7) A10(-16,-0.7) A11(-15,-0.7) A12(-12,-0.7) A13(-11,-0.7) A14(-10,-0.7) A15(-9,-0.7) A16(-8,-0.7) A17(-7,-0.7) A18(-6,-0.7) A19(-5,-0.7) A20(-4,-0.7) A21(-3,-0.7) A22(-2,-0.7) A23(-1,-0.7) A24(0,-0.7) A25(1,-0.7) A26(2,-0.7) A27(3,-0.7) A28(4,-0.7) A29(5,-0.7) A30(6,-0.7) A31(7,-0.7) A32(8,-0.7) A33(9,-0.7) A34(10,-0.7) A35(11,-0.7) A36(12,-0.7) A37(13,-0.7) A38(14,-0.7) A39(15,-0.7) A40(16,-0.7) A41(17,-0.7) A42(18,-0.7) A43(19,-0.7) A44(20,-0.7) A45(21,-0.7) A46(22,-0.7) A47(23,-0.7) A48(24,-0.7) A49(25,-0.7) B1(-25,-0.7) B2(-24,-0.7) B3(-23,-0.7) B4(-22,-0.7) B5(-21,-0.7) B6(-20,-0.7) B7(-19,-0.7) B8(-18,-0.7) B9(-17,-0.7) B10(-16,-0.7) B11(-15,-0.7) B12(-12,-0.7) B13(-11,-0.7) B14(-10,-0.7) B15(-9,-0.7) B16(-8,-0.7) B18(-6,-0.7) B19(-5,-0.7) B20(-4,-0.7) B21(-3,-0.7) B22(-2,-0.7) B23(-1,-0.7) B24(0,-0.7) B25(1,-0.7) B26(2,-0.7) B27(3,-0.7) B28(4,-0.7) B29(5,-0.7) B30(6,-0.7) B32(8,-0.7) B33(9,-0.7) B34(10,-0.7) B35(11,-0.7) B36(12,-0.7) B37(13,-0.7) B38(14,-0.7) B39(15,-0.7) B40(16,-0.7) B41(17,-0.7) B42(18,-0.7) B43(19,-0.7) B44(20,-0.7) B45(21,-0.7) B46(22,-0.7) B47(23,-0.7) B49(25,-0.7)
HDMI19S
  oval 0.3x2.4 smd: 1(4.5,0) 2(4,0) 3(3.5,0) 4(3,0) 5(2.5,0) 6(2,0) 7(1.5,0) 8(1,0) 9(0.5,0) 10(0,0) 11(-0.5,0) 12(-1,0) 13(-1.5,0) 14(-2,0) 15(-2.5,0) 16(-3,0) 17(-3.5,0) 18(-4,0) 19(-4.5,0)
  oval 1.5x3.3 hole 0.9x2.7: BO1(7.25,-0.5) BO2(-7.25,-0.5) BO3(7.25,-6.5) BO4(-7.25,-6.5)
HDR254F-2X5X850
  rect 1.524x1.524 hole 1.016: 1(-1.27,5.08)
  round 1.524 hole 1.016: 2(1.27,5.08) 3(-1.27,2.54) 4(1.27,2.54) 5(-1.27,0) 6(1.27,0) 7(-1.27,-2.54) 8(1.27,-2.54) 9(-1.27,-5.08) 10(1.27,-5.08)
HOLE32CIR60
  round 1.016 hole 0.508: (-2.286,0) (-1.617,1.617) (-1.617,-1.617) (0,2.286) (0,-2.286) (1.617,1.617) (1.617,-1.617) (2.286,0)
  round 5.994 hole 3.2: 1(0,0)
HOLE170_244T
  round 6.2 hole 4.3 unplated: (0,0)
IDC40-2_54A
  rect 1.6x1.6 hole 1: 1(-24.13,-1.27)
  round 1.6 hole 1: 2(-24.13,1.27) 3(-21.59,-1.27) 4(-21.59,1.27) 5(-19.05,-1.27) 6(-19.05,1.27) 7(-16.51,-1.27) 8(-16.51,1.27) 9(-13.97,-1.27) 10(-13.97,1.27) 11(-11.43,-1.27) 12(-11.43,1.27) 13(-8.89,-1.27) 14(-8.89,1.27) 15(-6.35,-1.27) 16(-6.35,1.27) 17(-3.81,-1.27) 18(-3.81,1.27) 19(-1.27,-1.27) 20(-1.27,1.27) 21(1.27,-1.27) 22(1.27,1.27) 23(3.81,-1.27) 24(3.81,1.27) 25(6.35,-1.27) 26(6.35,1.27) 27(8.89,-1.27) 28(8.89,1.27) 29(11.43,-1.27) 30(11.43,1.27) 31(13.97,-1.27) 32(13.97,1.27) 33(16.51,-1.27) 34(16.51,1.27) 35(19.05,-1.27) 36(19.05,1.27) 37(21.59,-1.27) 38(21.59,1.27) 39(24.13,-1.27) 40(24.13,1.27)
KEY4X4-1P5H
  rect 1.626x1 smd: 1(-2.9,1.85) 2(2.9,1.85) 3(-2.9,-1.85) 4(2.9,-1.85)
L2520
  rect 0.914x2.032 smd: 1(-0.85,0) 2(0.85,0)
L4020
  rect 1.524x3.81 smd: 1(-1.5,0) 2(1.5,0)
M2_KEY_M_SOCKET
  rect 1.2x2.75 smd: (-10.35,3.3) (10.35,3.3)
  round 1.092 hole 1.092 unplated: (-10,-1.2)
  round 5 hole 3: (0,-41.6) (0,-59.6) (0,-79.6)
  round 1.6 hole 1.6 unplated: (10,-1.2)
  rect 0.3x1.55 smd: 1(-9.25,4.075) 2(-9,-3.475) 3(-8.75,4.075) 4(-8.5,-3.475) 5(-8.25,4.075) 6(-8,-3.475) 7(-7.75,4.075) 8(-7.5,-3.475) 9(-7.25,4.075) 10(-7,-3.475) 11(-6.75,4.075) 12(-6.5,-3.475) 13(-6.25,4.075) 14(-6,-3.475) 15(-5.75,4.075) 16(-5.5,-3.475) 17(-5.25,4.075) 18(-5,-3.475) 19(-4.75,4.075) 20(-4.5,-3.475) 21(-4.25,4.075) 22(-4,-3.475) 23(-3.75,4.075) 24(-3.5,-3.475) 25(-3.25,4.075) 26(-3,-3.475) 27(-2.75,4.075) 28(-2.5,-3.475) 29(-2.25,4.075) 30(-2,-3.475) 31(-1.75,4.075) 32(-1.5,-3.475) 33(-1.25,4.075) 34(-1,-3.475) 35(-0.75,4.075) 36(-0.5,-3.475) 37(-0.25,4.075) 38(0,-3.475) 39(0.25,4.075) 40(0.5,-3.475) 41(0.75,4.075) 42(1,-3.475) 43(1.25,4.075) 44(1.5,-3.475) 45(1.75,4.075) 46(2,-3.475) 47(2.25,4.075) 48(2.5,-3.475) 49(2.75,4.075) 50(3,-3.475) 51(3.25,4.075) 52(3.5,-3.475) 53(3.75,4.075) 54(4,-3.475) 55(4.25,4.075) 56(4.5,-3.475) 57(4.75,4.075) 58(5,-3.475) 67(7.25,4.075) 68(7.5,-3.475) 69(7.75,4.075) 70(8,-3.475) 71(8.25,4.075) 72(8.5,-3.475) 73(8.75,4.075) 74(9,-3.475) 75(9.25,4.075)
NB679
  rect 0.305x1.829 smd: 1(0.5,0.6) 2(-0.5,0.6) 7(0,-0.6)
  rect 1.016x0.305 smd: 3(-1.5,0.75) 4(-1.5,0.25) 5(-1.5,-0.25) 6(-1.5,-0.75) 9(1.5,-0.75) 10(1.5,-0.25) 11(1.5,0.25) 12(1.5,0.75)
  rect 0.305x1.016 smd: 8(0.5,-1)
QFN24-0P5-4X4
  oval 0.813x0.254 smd: 1(-1.925,1.25) 2(-1.925,0.75) 3(-1.925,0.25) 4(-1.925,-0.25) 5(-1.925,-0.75) 6(-1.925,-1.25) 13(1.925,-1.25) 14(1.925,-0.75) 15(1.925,-0.25) 16(1.925,0.25) 17(1.925,0.75) 18(1.925,1.25)
  oval 0.254x0.813 smd: 7(-1.25,-1.925) 8(-0.75,-1.925) 9(-0.25,-1.925) 10(0.25,-1.925) 11(0.75,-1.925) 12(1.25,-1.925) 19(1.25,1.925) 20(0.75,1.925) 21(0.25,1.925) 22(-0.25,1.925) 23(-0.75,1.925) 24(-1.25,1.925)
  rect 2.032x2.032 smd: 25(0,0)
QFN24-0P5-4X4-T
  oval 0.813x0.254 smd: 1(-2,1.25) 2(-2,0.75) 3(-2,0.25) 4(-2,-0.25) 5(-2,-0.75) 6(-2,-1.25) 13(2,-1.25) 14(2,-0.75) 15(2,-0.25) 16(2,0.25) 17(2,0.75) 18(2,1.25)
  oval 0.254x0.813 smd: 7(-1.25,-2) 8(-0.75,-2) 9(-0.25,-2) 10(0.25,-2) 11(0.75,-2) 12(1.25,-2) 19(1.25,2) 20(0.75,2) 21(0.25,2) 22(-0.25,2) 23(-0.75,2) 24(-1.25,2)
  rect 2.591x2.591 smd: 25(0,0)
QFN28-0P5-5X5
  oval 0.914x0.305 smd: 1(-2.4,1.5) 2(-2.4,1.001) 3(-2.4,0.5) 4(-2.4,0.001) 5(-2.4,-0.5) 6(-2.4,-1) 7(-2.4,-1.5) 15(2.4,-1.5) 16(2.4,-1) 17(2.4,-0.5) 18(2.4,0) 19(2.4,0.5) 20(2.4,1.001) 21(2.4,1.5)
  oval 0.305x0.914 smd: 8(-1.5,-2.4) 9(-1,-2.4) 10(-0.5,-2.4) 11(0,-2.4) 12(0.5,-2.4) 13(1,-2.4) 14(1.5,-2.4) 22(1.5,2.4) 23(1,2.4) 24(0.5,2.4) 25(0,2.4) 26(-0.5,2.4) 27(-1,2.4) 28(-1.5,2.4)
  rect 2.8x2.8 smd: 29(0,0)
QFN32-0P5-5X5T
  rect 0.8x0.25 smd: 1(-2.5,1.75) 2(-2.5,1.25) 3(-2.5,0.75) 4(-2.5,0.25) 5(-2.5,-0.25) 6(-2.5,-0.75) 7(-2.5,-1.25) 8(-2.5,-1.75) 17(2.5,-1.75) 18(2.5,-1.25) 19(2.5,-0.75) 20(2.5,-0.25) 21(2.5,0.25) 22(2.5,0.75) 23(2.5,1.25) 24(2.5,1.75)
  rect 0.25x0.8 smd: 9(-1.75,-2.5) 10(-1.25,-2.5) 11(-0.75,-2.5) 12(-0.25,-2.5) 13(0.25,-2.5) 14(0.75,-2.5) 15(1.25,-2.5) 16(1.75,-2.5) 25(1.75,2.5) 26(1.25,2.5) 27(0.75,2.5) 28(0.25,2.5) 29(-0.25,2.5) 30(-0.75,2.5) 31(-1.25,2.5) 32(-1.75,2.5)
  rect 3.4x3.4 smd: 33(0,0)
QFN36-0P5-6X6
  oval 1.422x0.305 smd: 1(-2.987,2) 2(-2.987,1.5) 3(-2.987,1) 4(-2.987,0.5) 5(-2.987,0) 6(-2.987,-0.5) 7(-2.987,-1) 8(-2.987,-1.5) 9(-2.987,-2) 19(2.987,-2) 20(2.987,-1.5) 21(2.987,-1) 22(2.987,-0.5) 23(2.987,0) 24(2.987,0.5) 25(2.987,1) 26(2.987,1.5) 27(2.987,2)
  oval 0.305x1.422 smd: 10(-2,-2.987) 11(-1.5,-2.987) 12(-1,-2.987) 13(-0.5,-2.987) 14(0,-2.987) 15(0.5,-2.987) 16(1,-2.987) 17(1.5,-2.987) 18(2,-2.987) 28(2,2.987) 29(1.5,2.987) 30(1,2.987) 31(0.5,2.987) 32(0,2.987) 33(-0.5,2.987) 34(-1,2.987) 35(-1.5,2.987) 36(-2,2.987)
  rect 3.708x3.708 smd: 37(0,0)
QFN56-0P5-8X8TS
  oval 1.016x0.305 smd: 1(-4,3.25) 2(-4,2.75) 3(-4,2.25) 4(-4,1.75) 5(-4,1.25) 6(-4,0.75) 7(-4,0.25) 8(-4,-0.25) 9(-4,-0.75) 10(-4,-1.25) 11(-4,-1.75) 12(-4,-2.25) 13(-4,-2.75) 14(-4,-3.25) 29(4,-3.25) 30(4,-2.75) 31(4,-2.25) 32(4,-1.75) 33(4,-1.25) 34(4,-0.75) 35(4,-0.25) 36(4,0.25) 37(4,0.75) 38(4,1.25) 39(4,1.75) 40(4,2.25) 41(4,2.75) 42(4,3.25)
  oval 0.305x1.016 smd: 15(-3.25,-4) 16(-2.75,-4) 17(-2.25,-4) 18(-1.75,-4) 19(-1.25,-4) 20(-0.75,-4) 21(-0.25,-4) 22(0.25,-4) 23(0.75,-4) 24(1.25,-4) 25(1.75,-4) 26(2.25,-4) 27(2.75,-4) 28(3.25,-4) 43(3.25,4) 44(2.75,4) 45(2.25,4) 46(1.75,4) 47(1.25,4) 48(0.75,4) 49(0.25,4) 50(-0.25,4) 51(-0.75,4) 52(-1.25,4) 53(-1.75,4) 54(-2.25,4) 55(-2.75,4) 56(-3.25,4)
  rect 6.096x6.096 smd: 57(0,0)
RJ45_HR911130A
  round 3.175 hole 3.175 unplated: (-5.715,0) (5.715,0)
  round 1.397 hole 0.889: 1(5.72,-8.89) 2(4.45,-6.35) 3(3.18,-8.89) 4(1.91,-6.35) 5(0.64,-8.89) 6(-0.63,-6.35) 7(-1.9,-8.89) 8(-3.17,-6.35) 9(-4.44,-8.89) 10(-5.71,-6.35)
  round 1.524 hole 1.016: 11(6.625,4.9) 12(4.085,4.9) 13(-4.085,4.9) 14(-6.625,4.9)
  round 2.413 hole 1.651: 15(7.745,-3.05) 16(-7.745,-3.05)
SC70-0P65-2X1P25
  rect 0.406x0.508 smd: 1(-0.65,-0.95) 2(0,-0.95) 3(0.65,-0.95) 4(0.65,0.95) 5(0,0.95) 6(-0.65,0.95)
SFP-1X4-CAGE-U-MAX
  rect 2x2 hole 1.05: G1(8.575,-5) G2(14.25,-5) G3(22.825,-5) G4(37.075,-5) G5(51.325,-5) G6(57,-5) G7(42.75,0) G9(0,0) G10(14.25,5) G11(57,5) G12(53.825,10) G13(48.425,10) G14(42.75,10) G15(39.575,10) G16(34.175,10) G18(25.325,10) G19(19.925,10) G20(11.075,10) G21(5.675,10) G22(0,10) G23(14.25,15) G24(57,15) G30(42.75,30) G31(42.75,20) G44(0,30) G45(0,20) G47(0,25) G49(42.75,25)
  rect 2x2 hole 0.95: G8(28.5,0) G17(28.5,10) G26(57,22.5) G27(57,27.5) G35(28.5,30) G36(28.5,20) G39(14.25,27.5) G40(14.25,22.5) G48(28.5,25)
  round 1.1 hole 0.95: G25(57,17.8) G28(49.875,32.1) G29(45.075,32.1) G32(42.75,17.8) G33(35.625,32.1) G34(30.825,32.1) G37(21.375,32.1) G38(16.575,32.1) G41(14.25,17.8) G42(7.125,32.1) G43(2.325,32.1) G46(0,17.8)
SIP3-2P54-0P4H
  rect 1.778x1.778 hole 1.016: 1(0,0)
  round 1.778 hole 1.016: 2(2.54,0.406) 3(5.08,0)
SMA
  rect 2.3x2 smd: A(-2,0) K(2,0)
SOD323
  rect 1.219x0.889 smd: A(-1.27,0) K(1.27,0)
SOD-123
  rect 1x1.6 smd: A(-1.7,0) K(1.7,0)
SOIC8-1P27-5X4
  rect 0.508x1.829 smd: 1(-1.905,-3) 2(-0.635,-3) 3(0.635,-3) 4(1.905,-3) 5(1.905,3) 6(0.635,3) 7(-0.635,3) 8(-1.905,3)
SOP8-0P65-2X4
  rect 0.406x1.219 smd: 1(-0.98,-2)
  oval 0.406x1.219 smd: 2(-0.33,-2) 3(0.33,-2) 4(0.98,-2) 5(0.98,2) 6(0.33,2) 7(-0.33,2) 8(-0.98,2)
SOP8-0P65-3X4P4
  rect 1.016x0.406 smd: 1(-3,0.975) 2(-3,0.325) 3(-3,-0.325) 4(-3,-0.975) 5(3,-0.975) 6(3,-0.325) 7(3,0.325) 8(3,0.975)
SOT23
  rect 1x0.6 smd: 1(-1.15,0.95) 2(-1.15,-0.95) 3(1.15,0)
SOT23-5
  rect 1.118x0.61 smd: 1(-1.35,0.95) 2(-1.35,0) 3(-1.35,-0.95) 4(1.35,-0.95) 5(1.35,0.95)
SOT23-8
  rect 0.4x1.2 smd: 1(-0.975,-1.3)
  oval 0.4x1.2 smd: 2(-0.325,-1.3) 3(0.325,-1.3) 4(0.975,-1.3) 5(0.975,1.3) 6(0.325,1.3) 7(-0.325,1.3) 8(-0.975,1.3)
SOT23-236AB
  rect 0.61x0.914 smd: 1(-0.95,-1) 2(0.95,-1) 3(0,1)
SOT-23
  rect 0.686x0.991 smd: 1(-0.95,-1.295) 2(0,-1.295) 3(0.95,-1.295) 4(0.95,1.295) 5(-0.95,1.295)
SW6-2P5-5P5
  rect 1.422x1.422 hole 0.813: 1(-2.5,-2.75)
  round 1.422 hole 0.813: 2(0,-2.75) 3(2.5,-2.75) 4(-2.5,2.75) 5(0,2.75) 6(2.5,2.75)
TF-15-15B
  round 1.016 hole 1.016 unplated: (-4.95,-3.5) (3.05,-3.5)
  rect 0.7x1.4 smd: 1(2.25,7.1) 2(1.15,7.1) 3(0.05,7.1) 4(-1.05,7.1) 5(-2.15,7.1) 6(-3.25,7.1) 7(-4.35,7.1) 8(-5.45,7.1) 9(-6.55,7.1)
  rect 1.6x1.4 smd: 10(-8,6.5) 11(6.85,6.5)
  rect 1.2x2.2 smd: 12(-7.75,-3.1) 13(7.75,-3.1)
TP4
  round 1 smd: 1(0,0)
unnamed#2
  round 1.016 smd: 1(0,0)
USB_TPYEA_DUAL
  round 1.397 hole 0.889: A1(-1.3,3.5) A2(-1.3,1) A3(-1.3,-1) A4(-1.3,-3.5) B1(1.3,3.5) B2(1.3,1) B3(1.3,-1) B4(1.3,-3.5)
  round 3.353 hole 2.337: S1(1.65,6.5) S2(1.65,-6.5) S3(-4.15,6.5) S4(-4.15,-6.5)
USBMICRO_H
  round 0.61 hole 0.61 unplated: (-2,-1.264) (2,-1.264)
  rect 0.406x1.778 smd: 1(-1.3,0) 2(-0.65,0) 3(0,0) 4(0.65,0) 5(1.3,0)
  oval 1.016x1.778 hole 0.508x1.27: 6(-3.6,0.056) 7(3.6,0.056) 8(-3.6,-3.414) 9(3.6,-3.414)
  rect 1.118x1.016 smd: 10(-1.5,-4.564) 11(1.5,-4.564)
XH2_1X2_2P54MM
  oval 2.032x1.524 hole 1.016: 1(0,-1.27) 2(0,1.27)
XTAL3225M
  rect 1.2x1.2 smd: 1(-1.2,-0.95) 2(1.2,-0.95) 3(1.2,0.95) 4(-1.2,0.95)

## Nets
3.3V_PCIE: J24.A9(+3.3V#A9) J24.A10(+3.3V#A10) J24.B8(+3.3V#B8)
12V_PCIE: D25.A J24.A2(+12V#A2) J24.A3(+12V#A3) J24.B1(+12V#B1) J24.B2(+12V#B2) J24.B3(+12V#B3)
GND: BT1.2 C3.2 C4.1 C5.1 C6.2 C7.1 C8.1 C9.2 C10.2 C11.2 C12.2 C13.2 C14.2 C15.2 C16.2 C17.2 C18.2 C19.2 C20.2 C21.2 C22.2 C23.2 C24.2 C25.2 C26.2 C27.2 C28.2 C29.2 C35.2 C36.2 C37.2 C38.2 C39.2 C40.2 C41.2 C42.2 C43.2 C44.2 C45.2 C46.2 C47.2 C52.2 C53.2 C82.2 C87.1 C88.1 C89.1 C90.1 C91.2 C93.1 C96.1 C97.1 C100.1 C102.1 C103.1 C104.2 C105.2 C106.2 C107.2 C108.2 C109.2 C112.2 C113.2 C114.2 C115.2 C116.2 C118.2 C123.2 C124.2 C125.2 C126.2 C127.2 C128.2 C129.2 C172.2 C176.2 C177.2 C272.2 C273.2 C274.2 C275.2 C276.2 C277.2 C278.2 C279.2 C280.2 C281.2 C282.2 C283.2 C284.2 C285.2 C286.2 C287.2 C288.2 C289.2 C290.2 C291.2 C292.2 C293.2 C294.2 C295.2 C316.1 C317.1 C318.2 C319.2 C340.2 C341.1 C342.2 C343.1 C344.2 C345.2 C366.1 C367.1 C369.2 C370.2 C371.1 C372.1 C373.2 C374.2 J2.2 J2.10 J3.2 J4.5(GND) J4.6 J4.7 J4.8 J4.9 J4.10 J4.11 J5.6(VSS#6) J5.10(VSS#10) J5.11(VSS#11) J5.12(VSS#12) J5.13(VSS#13) J6.A4(GND1) J6.B4(GND2) J6.S1(SH1) J6.S2(SH2) J6.S3(SH3) J6.S4(SH4) J7.A4(GND1) J7.B4(GND2) J7.S1(SH1) J7.S2(SH2) J7.S3(SH3) J7.S4(SH4) J8.10(PGND) J8.15(SHIELD1) J8.16(SHIELD2) J9.10(PGND) J9.15(SHIELD1) J9.16(SHIELD2) J11.1(GND#1) J11.3(GND#3) J11.9(GND#9) J11.15(GND#15) J11.21(GND#21) J11.27(GND#27) J11.33(GND#33) J11.39(GND#39) J11.45(GND#45) J11.51(GND#51) J11.57(GND#57) J11.71(GND#71) J11.73(GND#73) J11.75(GND#75) J18.2(GND2) J18.3(GND1) J20.1(VEET#1) J20.10(VEER#10) J20.11(VEER#11) J20.14(VEER#14) J20.17(VEET#17) J20.20(VEET#20) J21.1(VEET#1) J21.10(VEER#10) J21.11(VEER#11) J21.14(VEER#14) J21.17(VEET#17) J21.20(VEET#20) J22.1(VEET#1) J22.10(VEER#10) J22.11(VEER#11) J22.14(VEER#14) J22.17(VEET#17) J22.20(VEET#20) J23.1(VEET#1) J23.10(VEER#10) J23.11(VEER#11) J23.14(VEER#14) J23.17(VEET#17) J23.20(VEET#20) J24.A4(GND#A4) J24.A12(GND#A12) J24.A15(GND#A15) J24.A18(GND#A18) J24.A20(GND#A20) J24.A23(GND#A23) J24.A24(GND#A24) J24.A27(GND#A27) J24.A28(GND#A28) J24.A31(GND#A31) J24.A34(GND#A34) J24.A37(GND#A37) J24.A38(GND#A38) J24.A41(GND#A41) J24.A42(GND#A42) J24.A45(GND#A45) J24.A46(GND#A46) J24.A49(GND#A49) J24.B4(GND#B4) J24.B7(GND#B7) J24.B13(GND#B13) J24.B16(GND#B16) J24.B18(GND#B18) J24.B21(GND#B21) J24.B22(GND#B22) J24.B25(GND#B25) J24.B26(GND#B26) J24.B29(GND#B29) J24.B32(GND#B32) J24.B35(GND#B35) J24.B36(GND#B36) J24.B39(GND#B39) J24.B40(GND#B40) J24.B43(GND#B43) J24.B44(GND#B44) J24.B47(GND#B47) J24.B49(GND#B49) J25.12 J25.30 J26.12 J26.30 J27.2(D2S) J27.5(D1S) J27.8(D0S) J27.11(CLKS) J27.17(DCC/CECG) J27.BO1 J27.BO2 J27.BO3 J27.BO4 J28.1 JM1.21(11) JM1.22(71) JM1.31(16) JM1.32(76) JM1.41(21) JM1.42(81) JM1.61(31) JM1.62(91) JM1.71(36) JM1.72(96) JM1.81(41) JM1.82(101) JM1.91(46) JM1.92(106) JM1.101(51) JM1.102(111) JM1.111(56) JM1.112(116) JM2.1 JM2.2(61) JM2.11(6) JM2.12(66) JM2.21(11) JM2.22(71) JM2.31(16) JM2.32(76) JM2.41(21) JM2.42(81) JM2.51(26) JM2.52(86) JM2.61(31) JM2.62(91) JM2.71(36) JM2.72(96) JM2.81(41) JM2.82(101) JM2.91(46) JM2.92(106) JM2.101(51) JM2.102(111) JM2.111(56) JM2.112(116) JM3.1 JM3.2(61) JM3.11(6) JM3.12(66) JM3.21(11) JM3.22(71) JM3.31(16) JM3.32(76) JM3.41(21) JM3.42(81) JM3.51(26) JM3.52(86) JM3.61(31) JM3.62(91) JM3.71(36) JM3.72(96) JM3.81(41) JM3.82(101) JM3.91(46) JM3.92(106) JM3.101(51) JM3.102(111) JM3.111(56) JM3.112(116) JM4.1 JM4.2(61) JM4.7(4) JM4.8(64) JM4.13(7) JM4.14(67) JM4.19(10) JM4.20(70) JM4.25(13) JM4.26(73) JM4.31(16) JM4.32(76) JM4.37(19) JM4.38(79) JM4.43(22) JM4.44(82) JM4.49(25) JM4.50(85) JM4.55(28) JM4.56(88) JM4.61(31) JM4.62(91) JM4.67(34) JM4.68(94) JM4.73(37) JM4.74(97) JM4.79(40) JM4.80(100) JM4.85(43) JM4.86(103) JM4.91(46) JM4.92(106) JM4.97(49) JM4.98(109) JM4.103(52) JM4.104(112) JM4.109(55) JM4.110(115) JM4.115(58) JM4.116(118) K1.1 K1.2 K2.1 K2.2 K3.1 K3.2 K4.1 K4.2 K5.1 K5.2 M5.1 M6.1 M7.1 M8.1 Q1.S Q5.2(E) Q8.2(E) R11.1 R18.1 R21.2 R22.2 R23.2 R24.2 R25.2 R59.1 R60.1 R86.1 R94.1 R96.2 R109.2 R112.2 R118.1 R121.1 R144.2 R325.1 R326.1 R393.1 R396.1 SW1.3(B2) SW1.4(B1) U1.3(GND) U1.29(PGND) U2.2(GND) U3.2(GND#2) U3.11(GND#11) U3.25(PGND) U4.37(VSS_PAD) U6.57(PAD) U15.2(PGND) U15.4(NC) U15.10(AGND) U17.4(GND#4) U17.6(GND#6) U18.4(GND#4) U18.6(GND#6) U19.33(GND) U22.3(GND#3) U22.8(GND#8) U23.2(GND) U24.2(GND) U26.3(GND) U27.25(GND) U31.G1 U31.G2 U31.G3 U31.G4 U31.G5 U31.G6 U31.G7 U31.G8 U31.G9 U31.G10 U31.G11 U31.G12 U31.G13 U31.G14 U31.G15 U31.G16 U31.G17 U31.G18 U31.G19 U31.G20 U31.G21 U31.G22 U31.G23 U31.G24 U31.G25 U31.G26 U31.G27 U31.G28 U31.G29(GND1) U31.G30(GND2) U31.G31(GND3) U31.G32(GND4) U31.G33(GND5) U31.G34(GND6) U31.G35(GND7) U31.G36(GND8) U31.G37(GND9) U31.G38(GND10) U31.G39(GND11) U31.G40(GND12) U31.G41(GND13) U31.G42(GND14) U31.G43(GND15) U31.G44(GND16) U31.G45(GND17) U31.G46(GND18) U31.G47(GND19) U31.G48(GND20) U31.G49(GND21) U32.3(GND#3) U32.8(GND#8) U33.2(GND) U44.4(VSS) U45.1(NC1) U45.2(A1) U45.3(A2) U45.4(GND) U45.7(WP) X1.2(GND) Y1.2(GND#2) Y1.4(GND#4) Y2.2(GND#2) Y2.4(GND#4) Y4.2(GND#2) Y4.4(GND#4)
VCC_1V8: C10.1 C42.1 C43.1 C44.1 C94.1 C96.2 C97.2 C127.1 C129.1 C176.1 C177.1 JM1.117(59) JM1.119(60) L3.2 L16.1 R9.2 R46.1 R57.1 R82.2 R83.2 R84.2 R115.2 R145.1 U3.5(VCCA) U6.10(VDDO_SEL) U6.11(VDDO#11) U6.49(VDDO#49) U6.52(VDDO#52) U17.5(VOUT) U19.8(REFSEL0) U19.11(REFSEL1) U19.14(REFSEL2) U19.28(VDD18#28) U19.30(VDD18#30) U19.32(VDDIO)
VCC_1V8_CLK: B10.1 B11.2 C112.1 C113.1 C115.1 C116.1 C371.2 C372.2 L16.2 R114.1 R116.1 R117.1 R394.2 R395.1 R397.2 R398.1 U27.3(VDDREF) U27.15(VDDO34) U27.16(VDDO12)
